# Altium PCB DetectorBoard_V100.PcbDoc
Units mil, origin at the board's own origin, x right, y up, seen from the top; angles counter-clockwise.
Board outline 2004.11 x 2004.11 mil, 4 copper layers (Top Layer, Mid Layer 1, Mid Layer 2, Bottom Layer), stack 64.961 mil thick; 21 components, 13 nets, 59 pads, 6 vias.
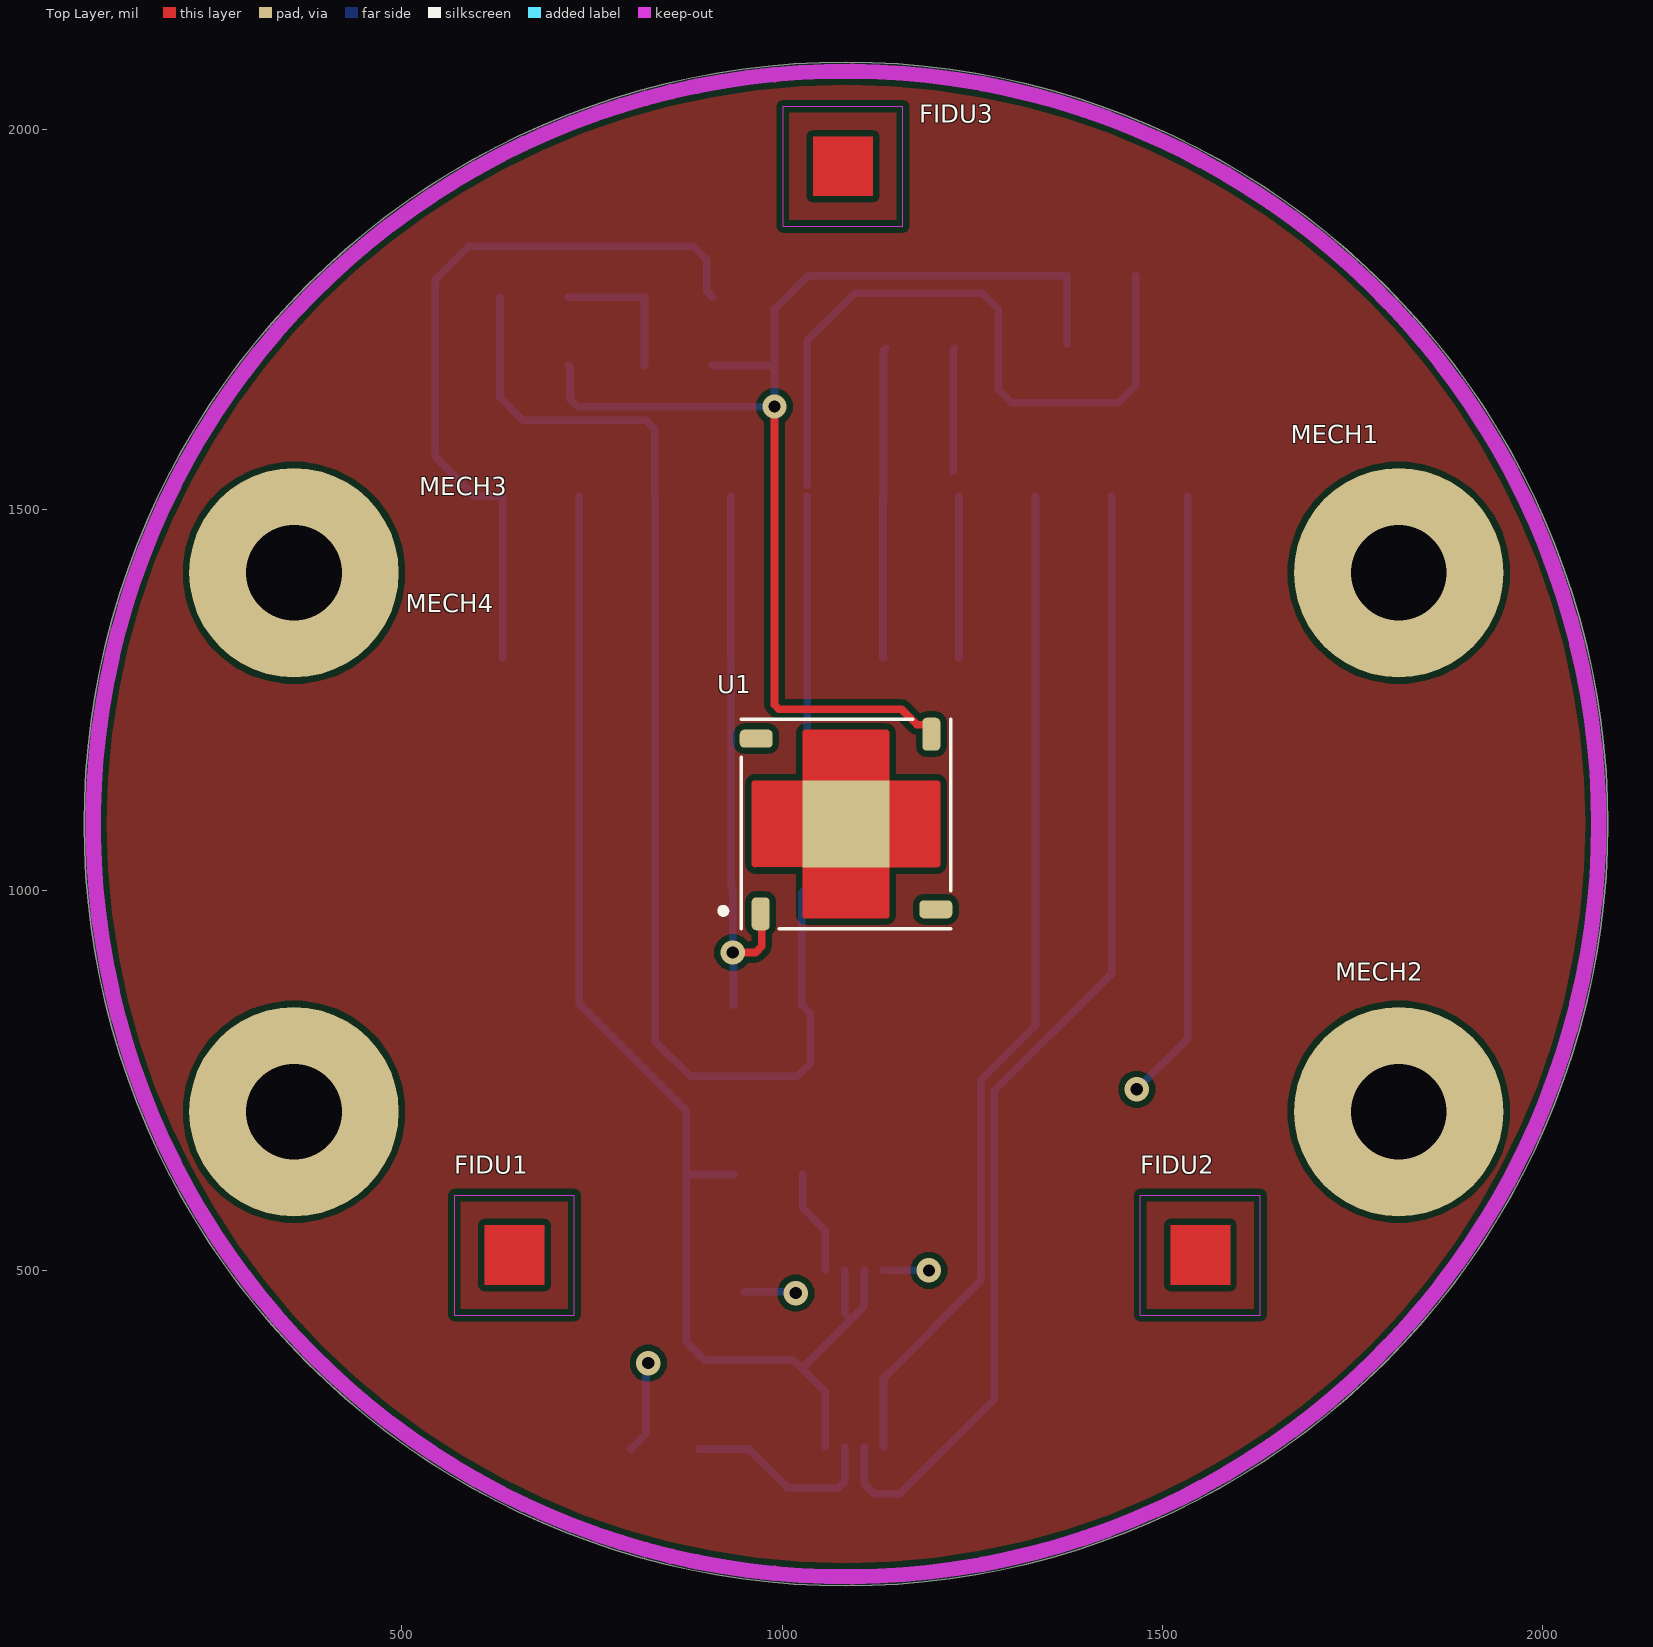
[diagram p0: Top Layer view]
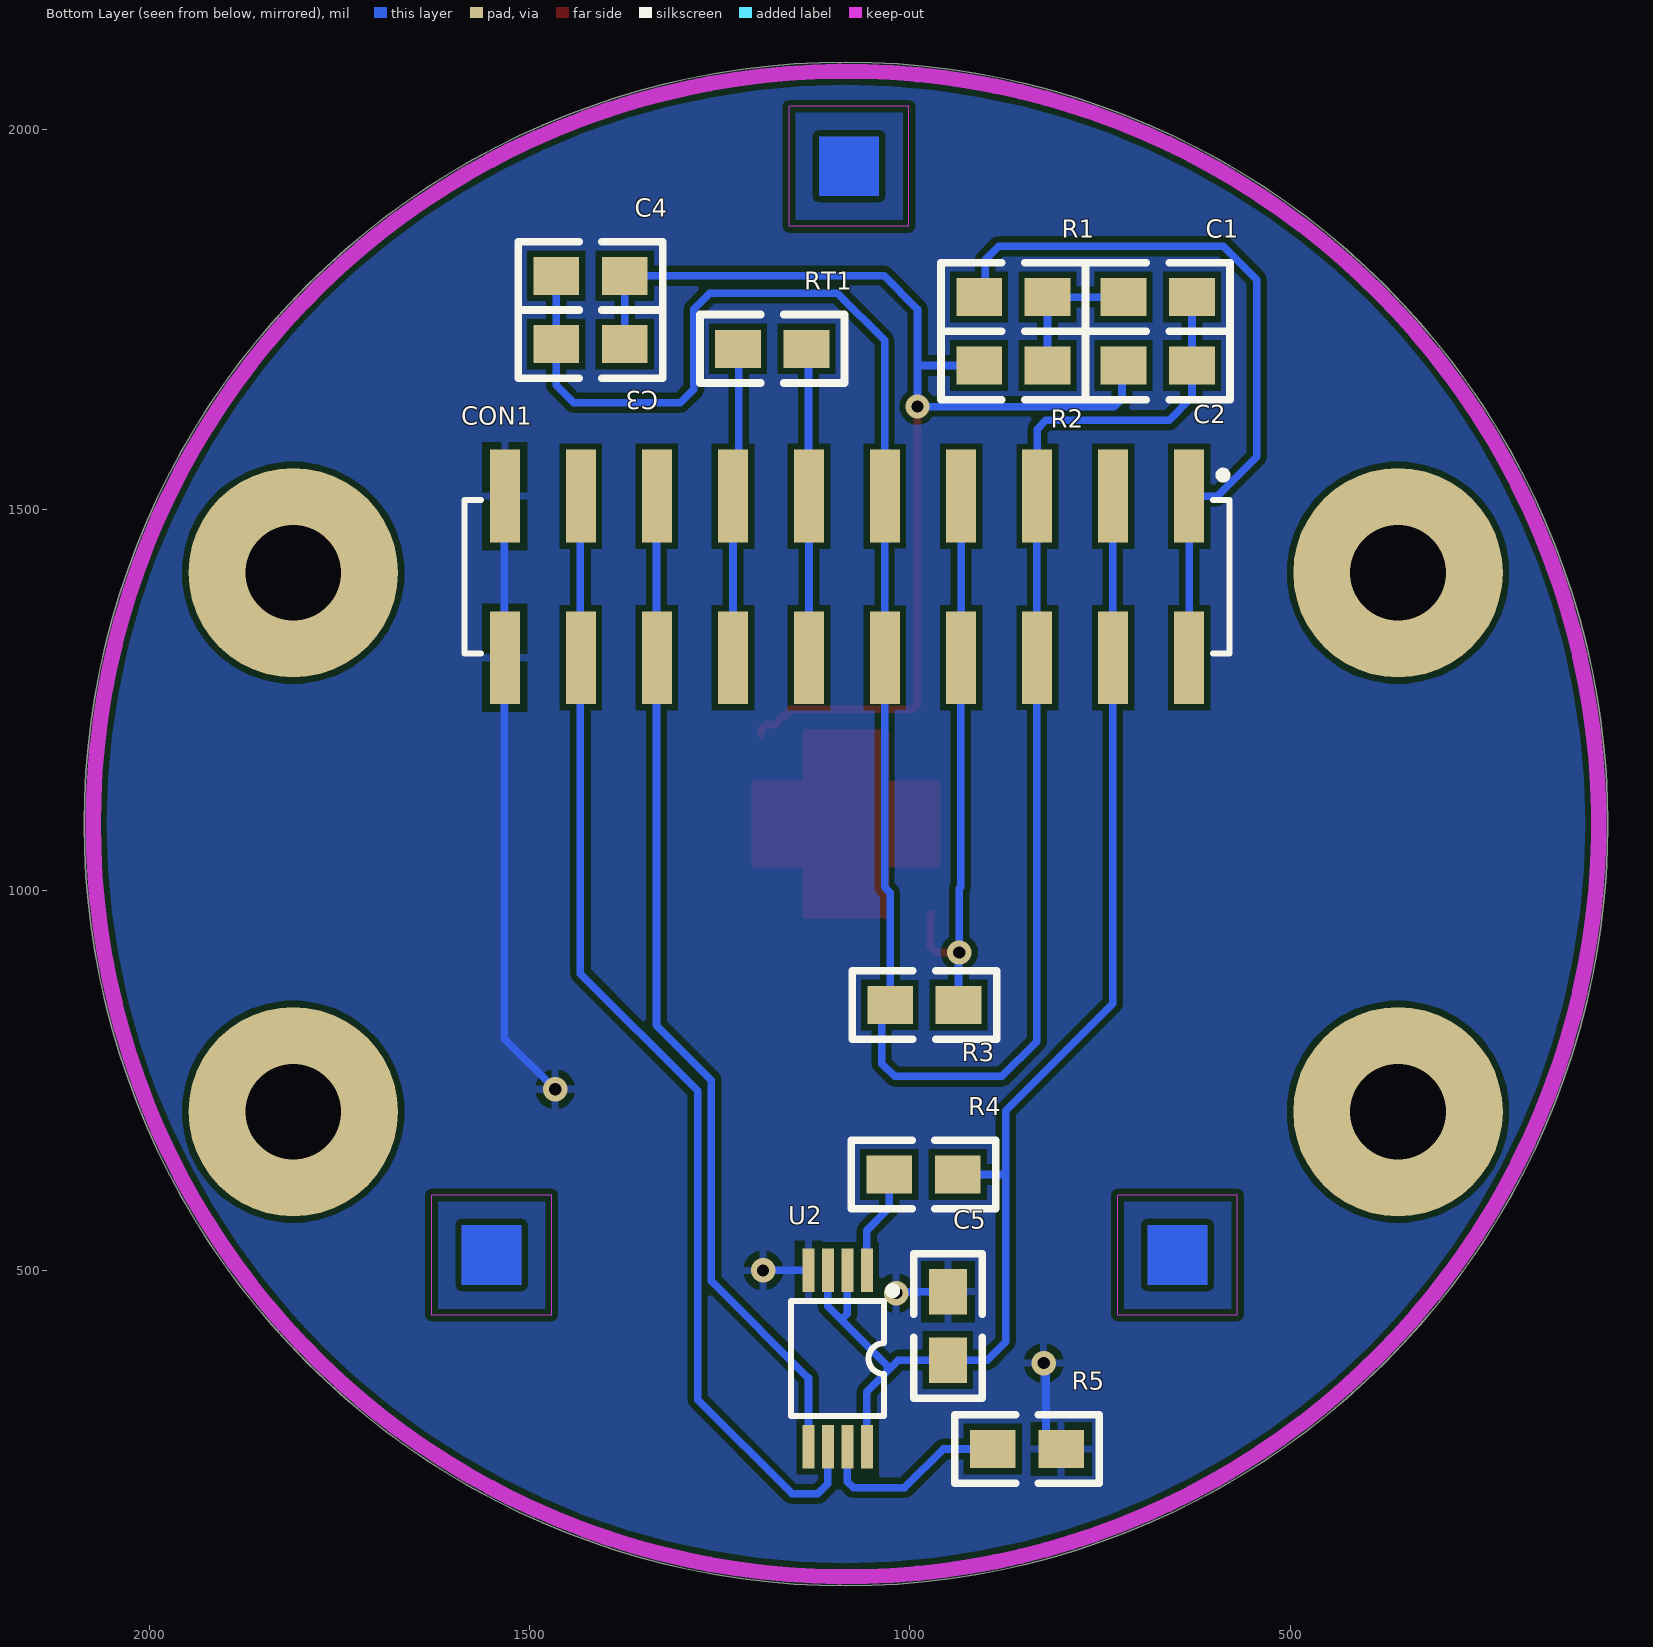
[diagram p1: Bottom Layer view, seen from below]
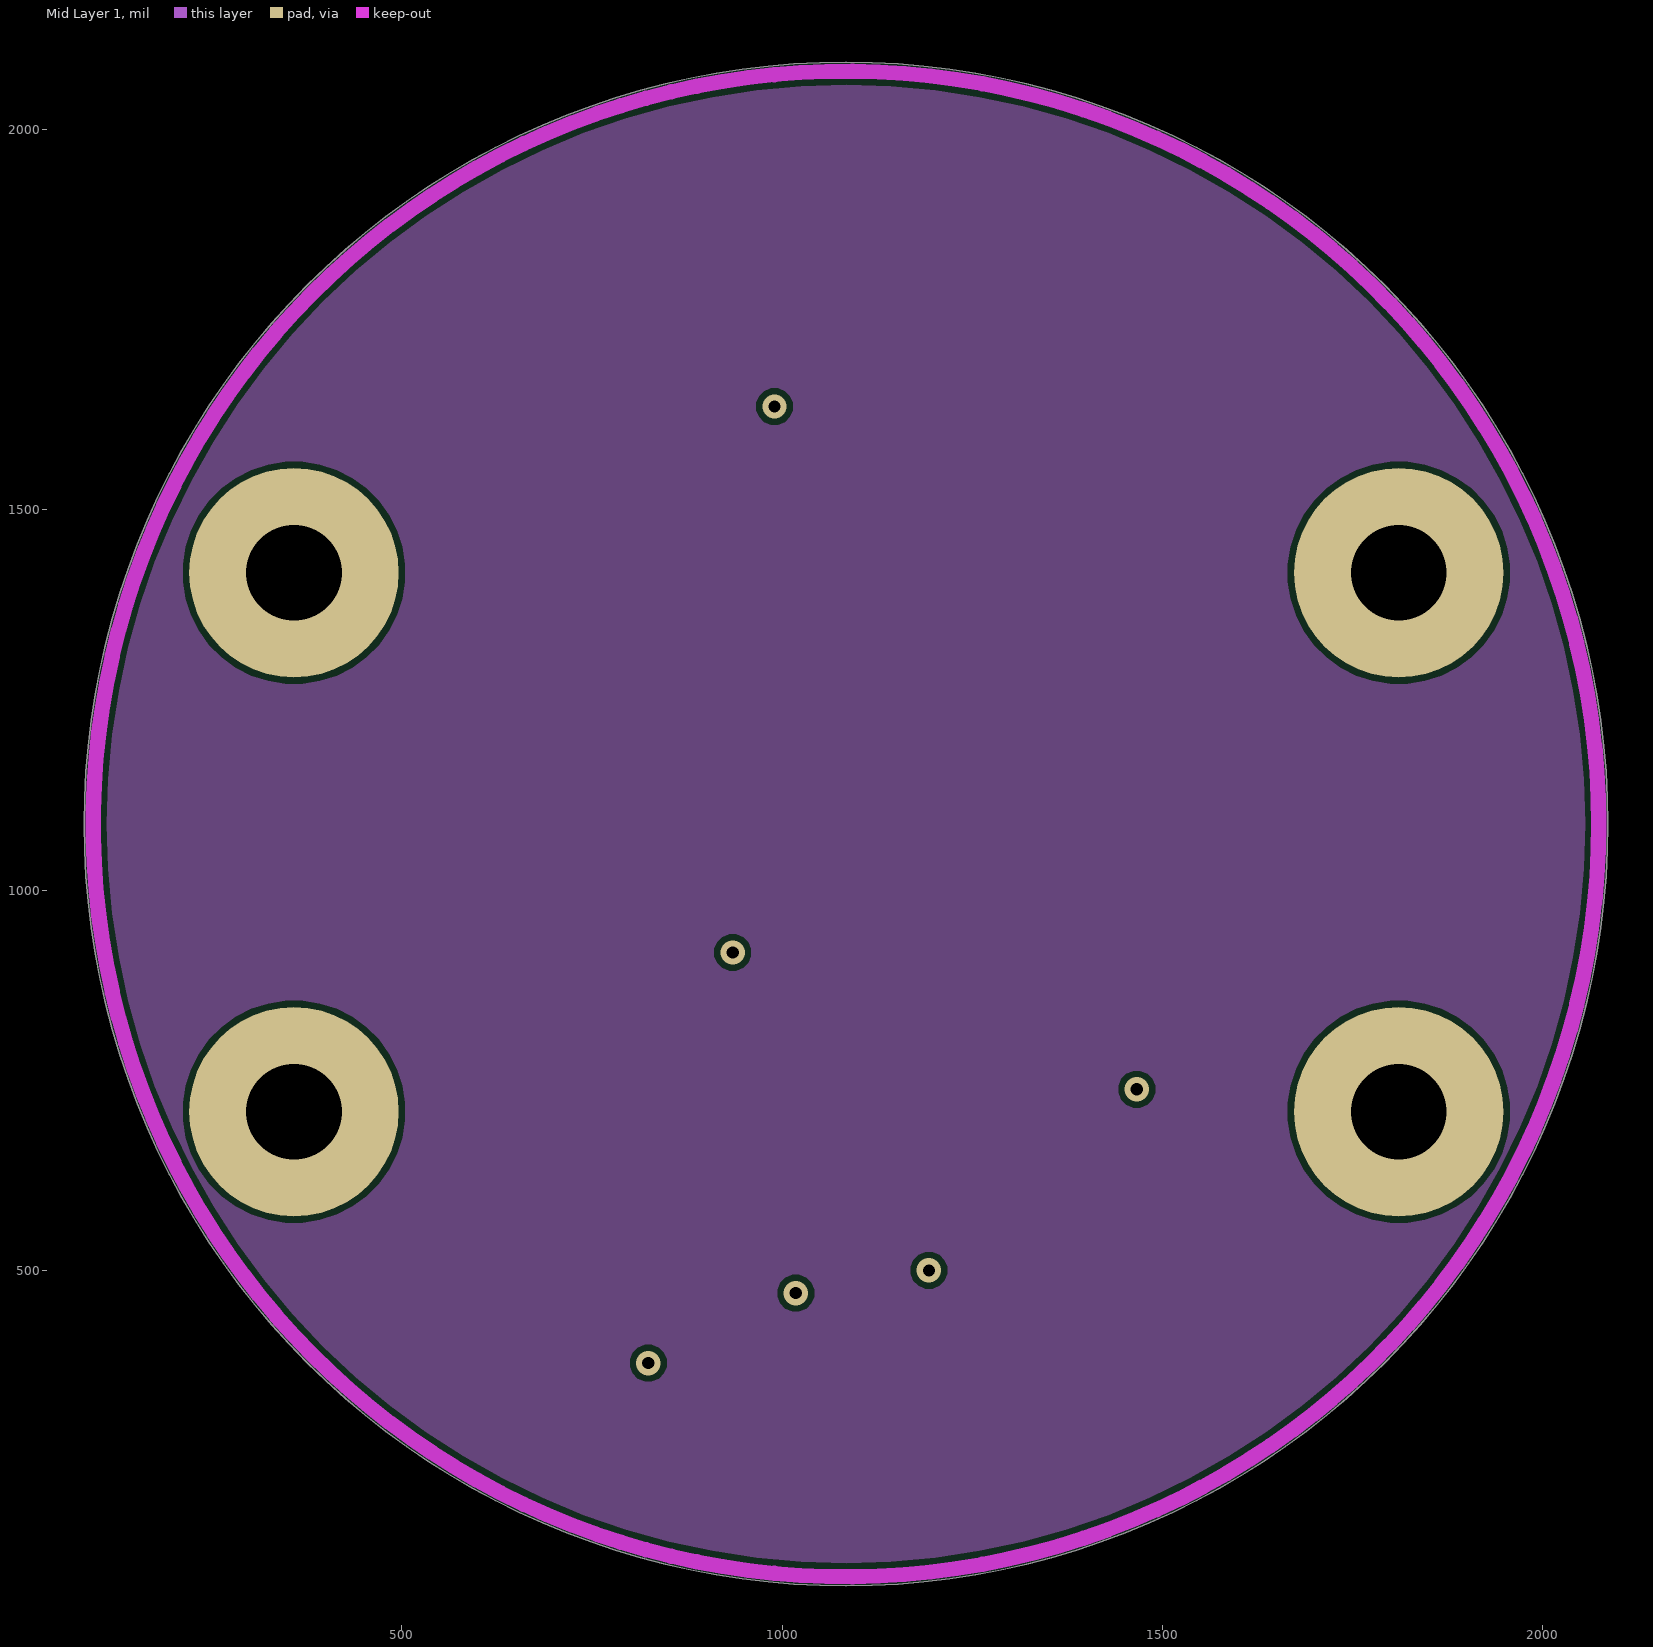
[diagram p2: Mid Layer 1]
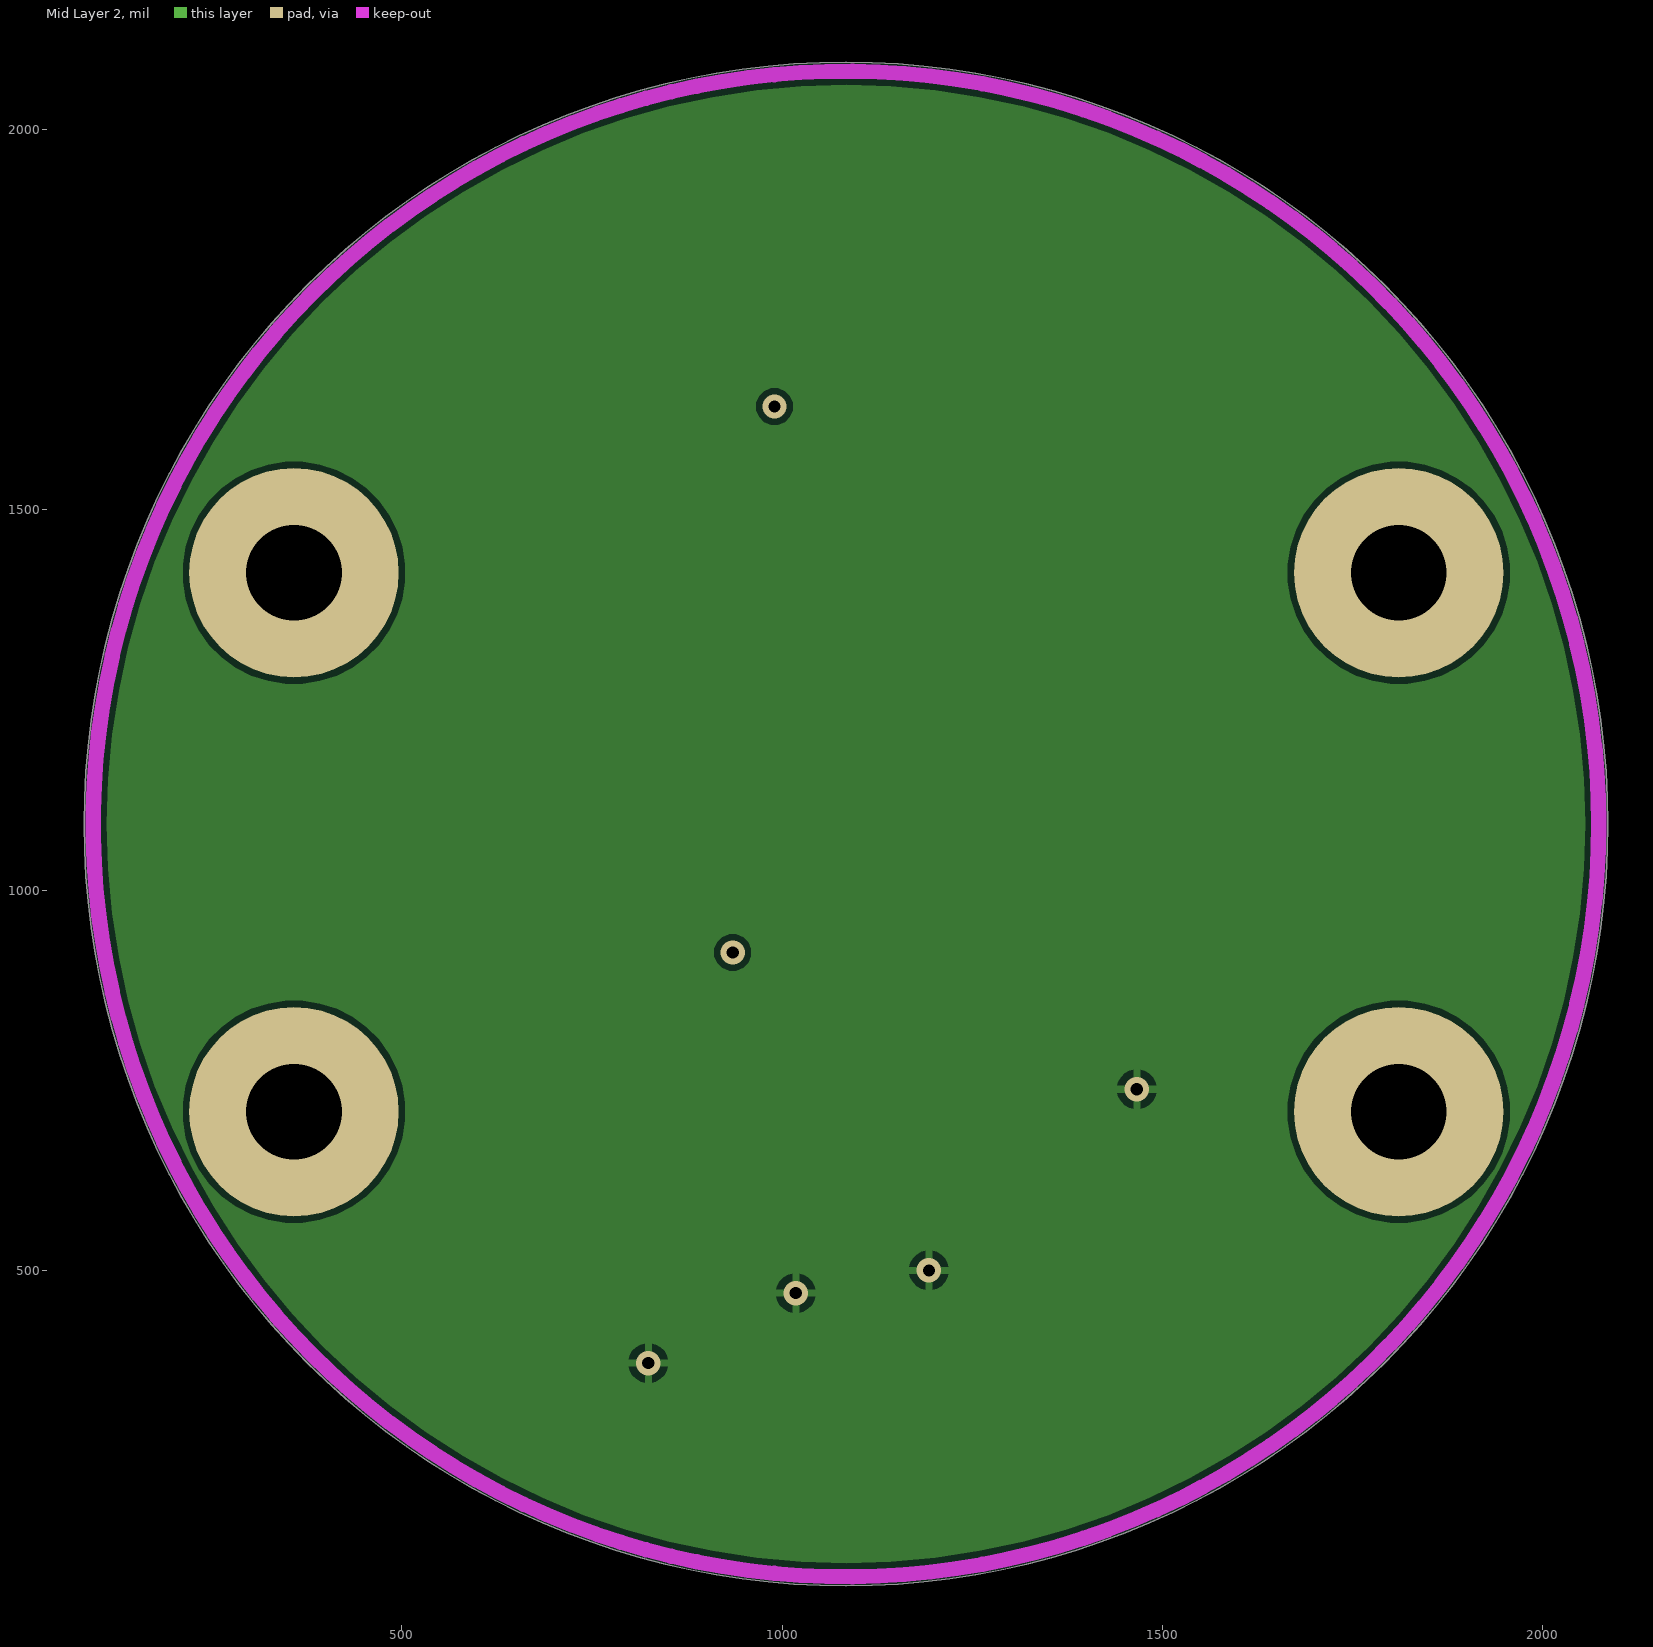
[diagram p3: Mid Layer 2]
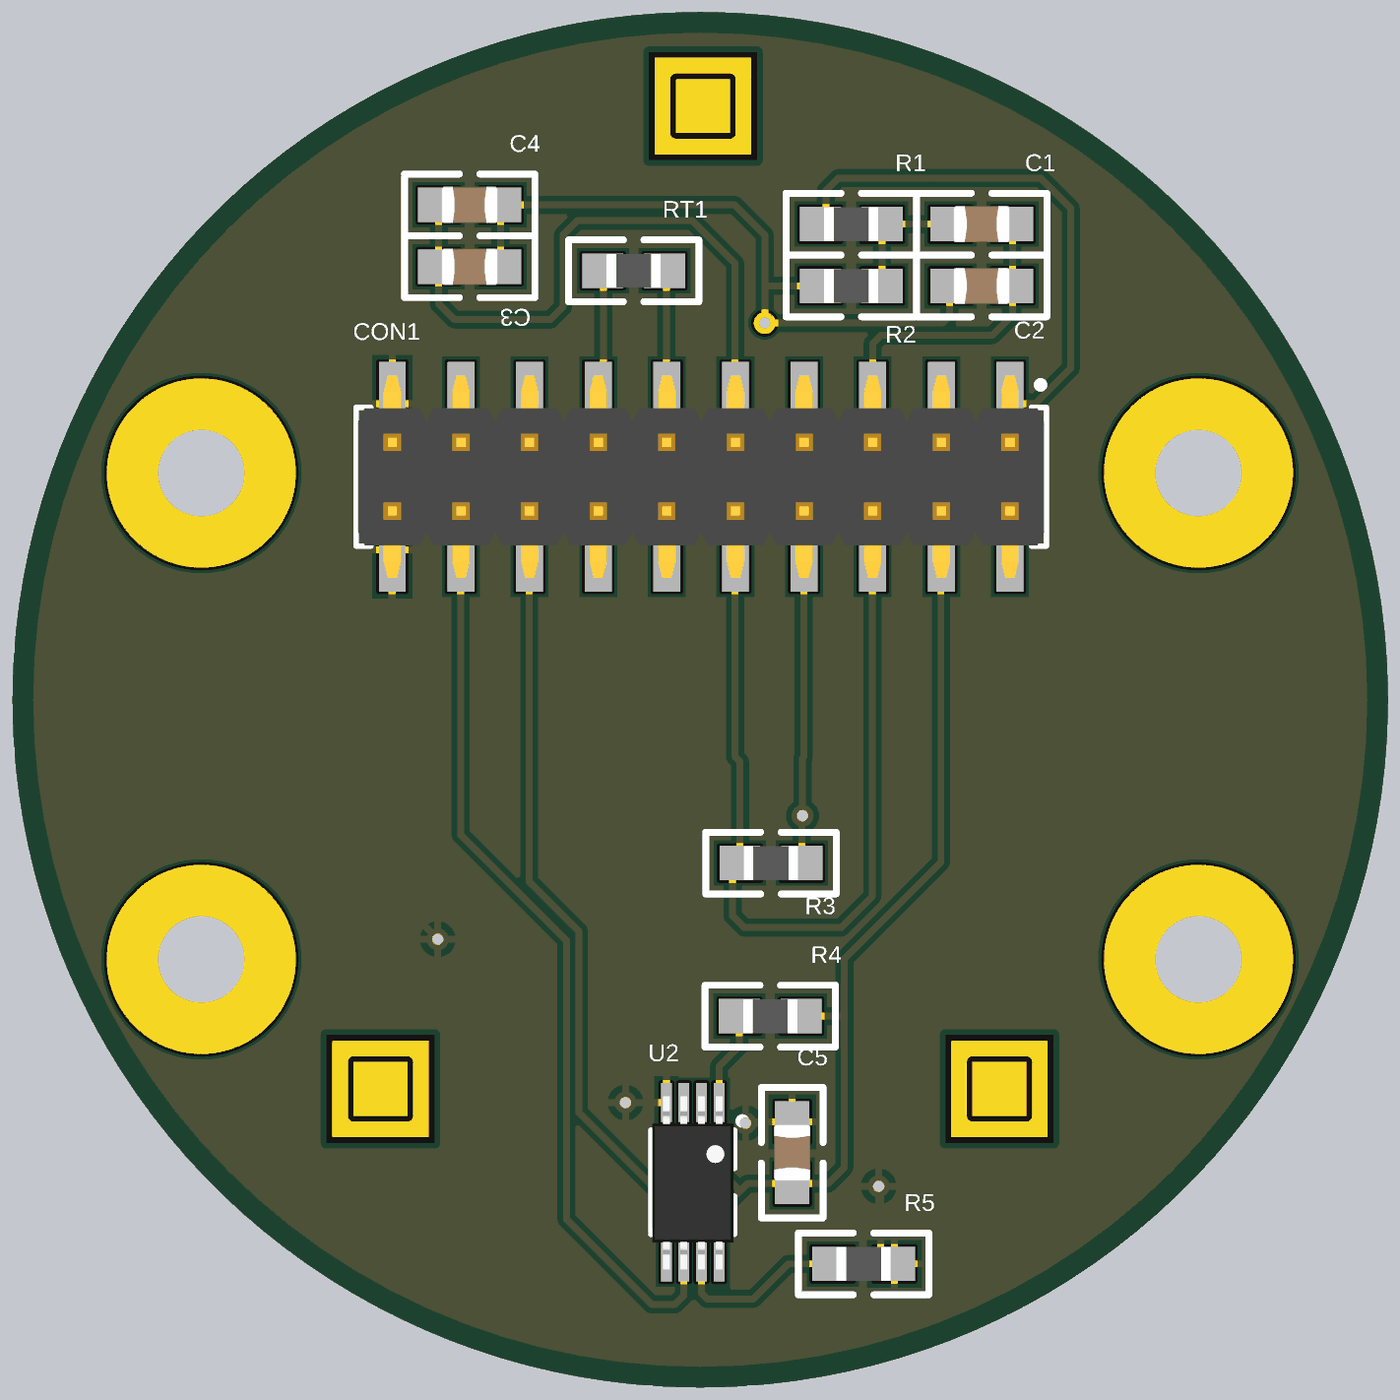
[diagram p4: 3D render of the assembled board from below, using the file's embedded part models]

## Layer stack, top to bottom
Top Solder: solder mask 0.5, Solder Resist, Dk 3.8
Top Layer: signal copper 2.9528
Dielectric 1: prepreg 7.874, 7628, Dk 4.6
Mid Layer 1: signal copper 0.689
Core: core 41.9291, FR-4, Dk 4.5
Mid Layer 2: signal copper 0.689
Dielectric 2: prepreg 7.874, 7628, Dk 4.6
Bottom Layer: signal copper 2.9528
Bottom Solder: solder mask 0.5, Solder Resist, Dk 3.8

## Board outline
81.94,1087 ccw(c1084,1087) 1084,84.94 ccw(c1084,1087) 2086.06,1087 ccw(c1084,1087) 1084,2089.06 ccw(c1084,1087)

## Design rules (kind name [scope] priority, off if disabled: settings)
Clearance [All] p1: gap=8 ignorepadtopadclearanceinfootprint=FALSE
PolygonConnect [All] p1: connectstyle=Relief reliefconductorwidth=10 reliefentries=4 polygonreliefangle="90 Angle" airgapwidth=10
RoutingVias [All] p1: holewidth=16 width=32 viastyle="Through Hole" minholewidth=16 minwidth=32 maxholewidth=16 maxwidth=32
SolderMaskExpansion [All] p1: expansion=4 istentingtop=FALSE
Width [All] p1: maxlimit=10 minlimit=10 preferedwidth=10
30 further rules are at their usual default settings.

## Components (designator, comment, footprint, x,y, rotation, side; value= is the part's Value field where it differs from the comment)
C1 "100nF / 50V" 0805_C 674,1780 r180 bottom
C2 "100nF / 50V" 0805_C 674,1690 r180 bottom
C3 "100nF / 50V" 0805_C 1420,1718 r0 bottom
C4 "100nF / 50V" 0805_C 1420,1808 r0 bottom
C5 "100nF / 50V" 0805_C 950,427 r270 bottom
CON1 "WE_61002021121" WE_61002021121 1082.68,1411.97 r0 bottom
FIDU1 "FIDU" FIDU_4x4 648,520 r90 top
FIDU2 "FIDU" FIDU_4x4 1550,520 r90 top
FIDU3 "FIDU" FIDU_4x4 1080,1952 r90 top
MECH1 "MH M3" "PAD_M3 x 7" 1811.02,1417.32 r0 top
MECH2 "MH M3" "PAD_M3 x 7" 1811.02,708.66 r0 top
MECH3 "MH M3" "PAD_M3 x 7" 358,1417.32 r0 top
MECH4 "MH M3" "PAD_M3 x 7" 358,708.66 r0 top
R1 "49.9R" 0805 864,1780 r180 bottom
R2 "49.9R" 0805 864,1690 r0 bottom
R3 "49.9R" 0805 981,849 r180 bottom
R4 "0R" 0805 982,626 r0 bottom
R5 "0R" 0805 846,265 r180 bottom
RT1 "10k @ 25°C" 0805 1181,1712 r180 bottom
U1 "MICROFC-60035" MICROFC-60035-SMT-TR 1084,1087 r0 top
U2 "M24C02-FDW6TP" TSSOP-8 1095,384 r270 bottom

## Footprints (in the part's own frame and the unit in brackets; to place one, negate y for a bottom-side part, rotate by r counter-clockwise, add the part's x,y. Pads: shape width x height; smd on the part's side, far side on the other; paste and mask are expansions set on the pad)
0805 [mil]
  rect 60x50 smd: 1(-45,0) 2(45,0)
  silkscreen extent -95,-45 95,45, body extent -39,-25 39,25, height 24
0805_C [mil]
  rect 60x50 smd: 1(-45,0) 2(45,0)
  silkscreen extent -95,-45 95,45, body extent -41,-27 41,27, height 30
FIDU_4x4 [mil]
  Top Layer region: -39.37,-39.37 39.37,-39.37 39.37,39.37 -39.37,39.37
  Top Layer keep-out lines w0.39: -78.74,78.74 -78.74,-78.74 78.74,-78.74 78.74,78.74 -78.74,78.74
  Bottom Layer region: -39.37,-39.37 39.37,-39.37 39.37,39.37 -39.37,39.37
  Bottom Layer keep-out lines w0.39: -78.74,78.74 -78.74,-78.74 78.74,-78.74 78.74,78.74 -78.74,78.74
MICROFC-60035-SMT-TR [mm]
  rrect50% 0.6x1.1 smd: 1(-2.85,-3) 3(2.85,3)
  rrect50% 1.1x0.6 smd: 2(3,-2.85) 4(-3,2.85)
  rect 2.9x2.9 smd paste-2 mask+0: 5(0,0)
  Top Layer region: 256 vertices and 0 holes, not listed, extent -3.15,-3.15 3.15,3.15
  silkscreen extent -4.2,-3.5 3.5,3.5, body extent -3.47,-3.5 3.53,3.5, height 0.69
"PAD_M3 x 7" [mm]
  round 7 hole 3.2: M3(0,0)
TSSOP-8 [mm]
  rect 1.45x0.4 smd: 1(-2.95,0.975) 2(-2.95,0.325) 3(-2.95,-0.325) 4(-2.95,-0.975) 5(2.95,-0.975) 6(2.95,-0.325) 7(2.95,0.325) 8(2.95,0.975)
  silkscreen extent -2.39,-1.55 1.92,1.96, body extent -3.18,-1.5 3.22,1.5, height 1.2
WE_61002021121 [mm] "Pin Header, pitch 2.54 mm, SMD, Vertical, dual row, 20p"
  rect 1x3.1 smd: 1(-11.43,-2.7) 2(-11.43,2.7) 3(-8.89,-2.7) 4(-8.89,2.7) 5(-6.35,-2.7) 6(-6.35,2.7) 7(-3.81,-2.7) 8(-3.81,2.7) 9(-1.27,-2.7) 10(-1.27,2.7) 11(1.27,-2.7) 12(1.27,2.7) 13(3.81,-2.7) 14(3.81,2.7) 15(6.35,-2.7) 16(6.35,2.7) 17(8.89,-2.7) 18(8.89,2.7) 19(11.43,-2.7) 20(11.43,2.7)
  silkscreen extent -12.78,-3.52 12.78,2.57, body extent -12.7,-3.75 12.7,3.75, height 9.62

## Part data
C1 C2 C3 C4 C5: library part 149, "100nF 50V X7R", Part Number=SMD0805-100nF-50V, Azonosító=149, Category=Passives, Subcategory=PASS_Capacitor, Supplier 1=HESTORE, Supplier 1 order number=100.011.22
CON1: library part 396, "Board-To-Board Connector, Vertical, 2.54 mm, 2x10 Contacts, Header, WR-PHD Series, SMD", Part Number=61002021121, Azonosító=396, Category=Connectors, Help URL=https://www.we-online.com/components/products/datasheet/61002021121.pdf, Subcategory=ELME_Other, Supplier 1=MOUSER, Supplier 1 order number=710-61002021121
FIDU1 FIDU2 FIDU3: library part 275, "FIDU, 4x4mm, rectangle", Part Number=FIDU_4x4, Azonosító=275, Category=Electro-mechanicals, Subcategory=ELME_Other
MECH1 MECH2 MECH3 MECH4: library part 268, "3.2/7mm Mounting_Hole_M3", Part Number=Mounting_Hole_M3, Azonosító=268, Category=Electro-mechanicals, Subcategory=ELME_Other
R1 R2 R3: library part 43, "49.9R 0805 0.125W 1%", Part Number="SMD0805-49.9R 1%", Azonosító=43, Category=Passives, Subcategory=PASS_Resistor, Supplier 1=HESTORE, Supplier 1 order number=100.317.46
R4 R5: library part 38, "0R 0805 0.125W 5%", Part Number="0 R 5%", Azonosító=38, Category=Passives, Subcategory=PASS_Resistor, Supplier 1=HESTORE, Supplier 1 order number=100.275.70
RT1: library part 325, "NTC (Negative Temperature Coefficient) Thermistors THERMISTOR 0805 10K/3435", Part Number=TX08F103F3435ER, Azonosító=325, Category=Passives, Subcategory=PASS_Other, Supplier 1=MOUSER, Supplier 1 order number=588-TX08F103F3435ER
U1: library part 394, "Silicon Photomultipliers(SiPM), Low-Noise,Blue-Sensitive", Package="SMD-4 ON Semiconductor", Part Number=MICROFC-60035-SMT, Availability=Unavailable, Azonosító=394, Category=Optoelectronics, Help URL=https://hu.mouser.com/datasheet/2/308/1/MICROC_SERIES_D-2315622.pdf, MF="ON Semiconductor", MP=MICROFC-60035-SMT-TR1, Price=None, SnapEDA_Link=https://www.snapeda.com/parts/MICROFC-60035-SMT-TR1/ON%20Semiconductor/view-part/3228590/?ref=snap, Subcategory=SENS_Optical, Supplier 1=MOUSER, Supplier 1 order number=863-MFC60035SMTTR
U2: library part 345, "EEPROM Memory IC 2Kb (256 x 8) I2C 400kHz 900ns 8-TSSOP", Package="TSSOP-8 STMicroelectronics", Azonosító=345, Category="Integrated Circuits", Digi-Key_Part_Number=497-15746-1-ND, Help URL=https://www.st.com/resource/en/datasheet/m24c01-w.pdf, MF=STMicroelectronics, MP=M24C02-FDW6TP, Part Number=M24C02-FDW6TP, SnapEDA_Link=https://www.snapeda.com/parts/M24C02-FDW6TP/STMicroelectronics/view-part/1102461/?ref=snap, Subcategory=IC_Memory, Supplier 1=MOUSER, Supplier 1 order number=511-M24C02-FDW6TP

## Via types
v1: diameter 32, hole 16, Top Layer to Bottom Layer, tented both sides, 5 vias
v2: diameter 32, hole 16, Top Layer to Bottom Layer, 1 vias

## Nets (pads, with @x,y where several pads share a name; then routed paths per layer and width w, separated by ;. In a path a pad name is that pad's centre, name@x,y a point inside that pad or via, vN(x,y) a via of type N, cw(c..) or ccw(c..) an arc to the next point about the centre after c; other vN are vias at no path point)
+3.3V: C5.2 CON1.3 CON1.4 R4.1 U2.2 U2.3 U2.8 | length 1751.2
  Bottom Layer w10: CON1.3 733.25,1517.69 733.25,850.75 874,710 874,630 ; R4.1 878,626 874,630 ; U2.8 1056.61,340.39 1029.5,367.5 ; U2.2 1082.2,442.79 1090,435 ; U2.3 1107.8,452.8 1090,435 ; 874,630 874,406 898,382 C5.2 1015,382 1029.5,367.5 ; 1029.5,367.5 1029.5,374.5 1090,435
+VDET: CON1.1 CON1.2 R1.1 | length 990.7
  Bottom Layer w10: CON1.2 CON1.1 595.73,1518.27 544,1570 544,1803 588,1847 883,1847 901,1829 901,1788 R1.1
AGND: C1.2 C2.2 C3.2 C4.2 CON1.5 CON1.6 CON1.9 CON1.10 R3.1 | length 3065.1
  Bottom Layer w10: C1.2 C2.2 629,1648 659,1618 821,1618 832.68,1606.32 CON1.5 833.25,1517.69 833.25,800.75 879,755 1020,755 1037,772 1037,838 R3.1 1026,996.7 1033.25,1003.95 1033.25,1517.69 CON1.9 ; CON1.9@1033.25,1532.55 1033.25,1723 1095.25,1785 1263,1785 1284,1764 1284,1659 1302,1641 1442,1641 1465,1664 C3.2 C4.2
DET_CON: CON1.7 CON1.8 R3.2 U1.1 | length 755.3
  Top Layer w10: v1(935,918) 965,918 973,926 973,967.69 U1.1
  Bottom Layer w10: CON1.7 CON1.8 933.25,1305.09 933.25,1003.95 935,1002.2 v1(935,918) 936,917 R3.2
DET_NTC+: CON1.11 CON1.12 RT1.2 | length 407.5
  Bottom Layer w10: CON1.12 CON1.11 ; CON1.11@1133.25,1518.27 1133.25,1709.25 RT1.2
DET_NTC-: CON1.13 CON1.14 RT1.1 | length 374
  Bottom Layer w10: CON1.13@1225,1551 1225,1711 RT1.1 ; CON1.14 CON1.13
GND: C5.1 CON1.19 CON1.20 R5.2 U2.4 | length 1059.1
  Bottom Layer w10: R5.2 821,285 821,375 v1(824,378) ; C5.1 1016,472 v1(1018,470) ; U2.4 1192.86,500.14 v1(1193,500) ; v1(1466.47,738.09) 1533.25,804.87 1533.25,1517.69 CON1.19
NetC1_1: C1.1 R1.2 R2.1 | length 190
  Bottom Layer w10: C1.1 R1.2 R2.1
NetC2_1: C2.1 C3.1 C4.1 R2.2 U1.3 | length 1638.4
  Top Layer w10: v2(990,1636) 990,1243.86 995.86,1238 1157,1238 1177.44,1217.56 1189.46,1217.56 1196.2,1210.82 U1.3
  Bottom Layer w10: C2.1 721,1688 721,1646 731,1636 v2(990,1636) 990,1691 ; R2.2 989,1690 990,1691 ; C3.1 C4.1 1034,1808 990,1764 990,1691
NetR4_2: R4.2 U2.1 | length 138.1
  Bottom Layer w10: R4.2 1027,582 1056.61,552.39 U2.1
NetR5_1: R5.1 U2.7 | length 261.6
  Bottom Layer w10: R5.1 956,265 1007.11,213.89 1074.11,213.89 1082.2,221.98 U2.7
SCL: CON1.17 CON1.18 U2.6 | length 1529.1
  Bottom Layer w10: U2.6 1107.8,219.21 1121,206 1155,206 1279,330 1279,736 1433.25,890.25 1433.25,1517.69 CON1.17
SDA: CON1.15 CON1.16 U2.5 | length 1333.4
  Bottom Layer w10: U2.5 1133.39,358.39 1261,486 1261,750 1333.25,822.25 1333.25,1517.69 CON1.15
pads on no net: MECH1.M3 MECH2.M3 MECH3.M3 MECH4.M3 U1.2 U1.4 U1.5

## Polygon pours and split planes (outlines as drawn)
AGND on Mid Layer 1 "AGND_L02_P001" (solid, pour order 1): 83,1087 ccw(c1083,1087) 1083,87 ccw(c1083,1087) 2083,1087 ccw(c1083,1087) 1083,2087 ccw(c1083,1087)
GND on Mid Layer 2 "GND_L03_P002" (solid, pour order 2): 83,1087 ccw(c1083,1087) 1083,87 ccw(c1083,1087) 2083,1087 ccw(c1083,1087) 1083,2087 ccw(c1083,1087)
GND on Bottom Layer "GND_L04_P003" (solid, pour order 3): 83,1087 ccw(c1083,1087) 1083,87 ccw(c1083,1087) 2083,1087 ccw(c1083,1087) 1083,2087 ccw(c1083,1087)
AGND on Top Layer "AGND_L01_P000" (solid, pour order 0): 83,1087 ccw(c1083,1087) 1083,87 ccw(c1083,1087) 2083,1087 ccw(c1083,1087) 1083,2087 ccw(c1083,1087)

## Keep-outs
Keep-Out Layer:
  circle w20: c1084,1087 r990

## Silkscreen, mask and mechanical layers (free items; w line width, h text height)
Mechanical 1:
  circle w10: c1084,1087 r1002.06